# Allegro board 2019-08-16.brd
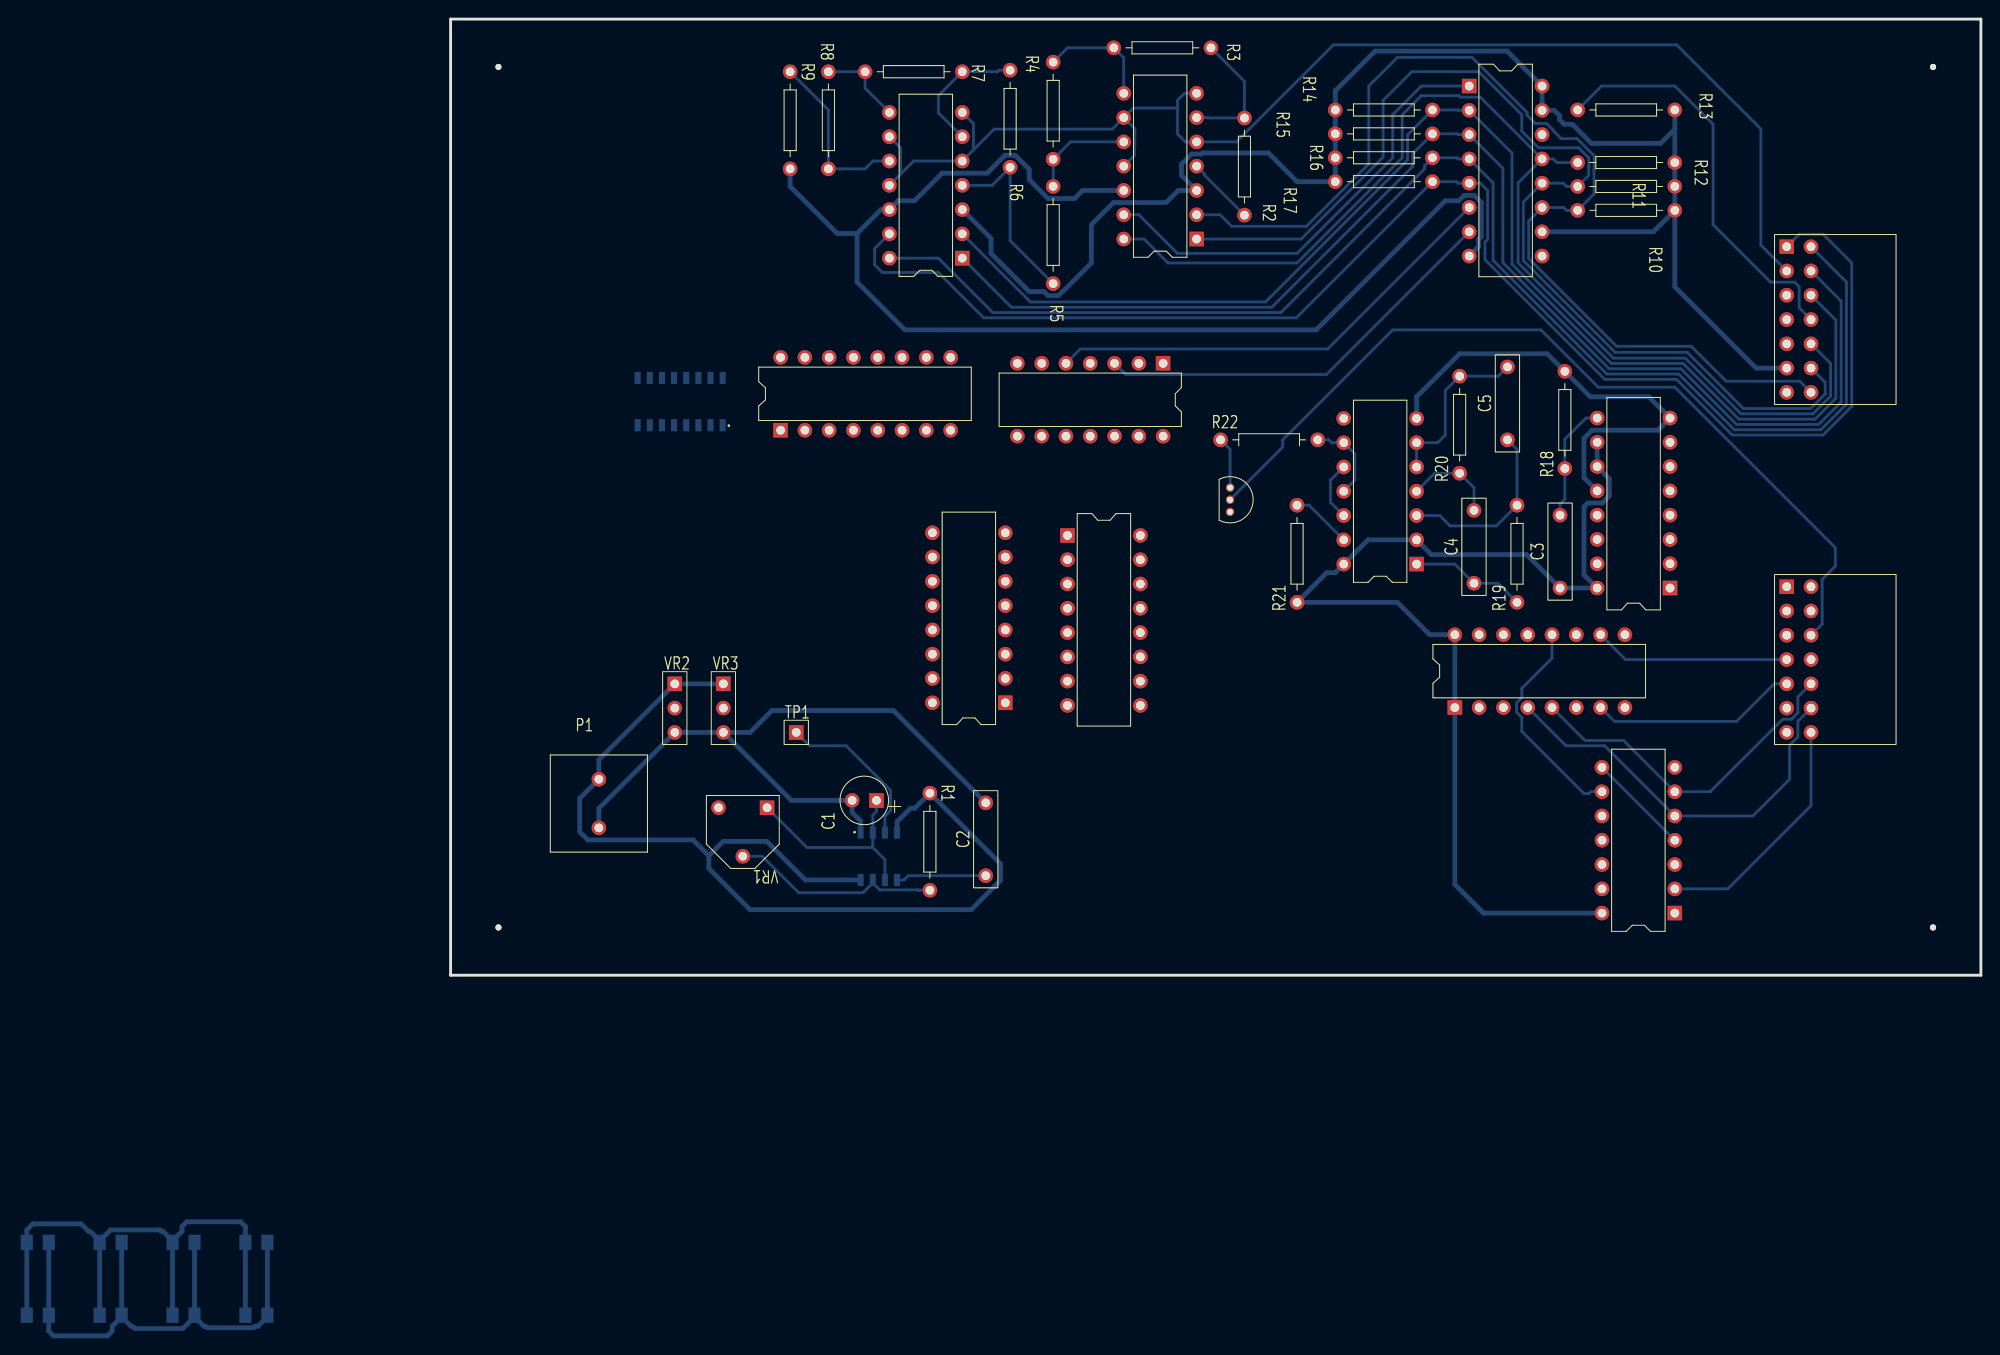
[diagram p0: board, top side]
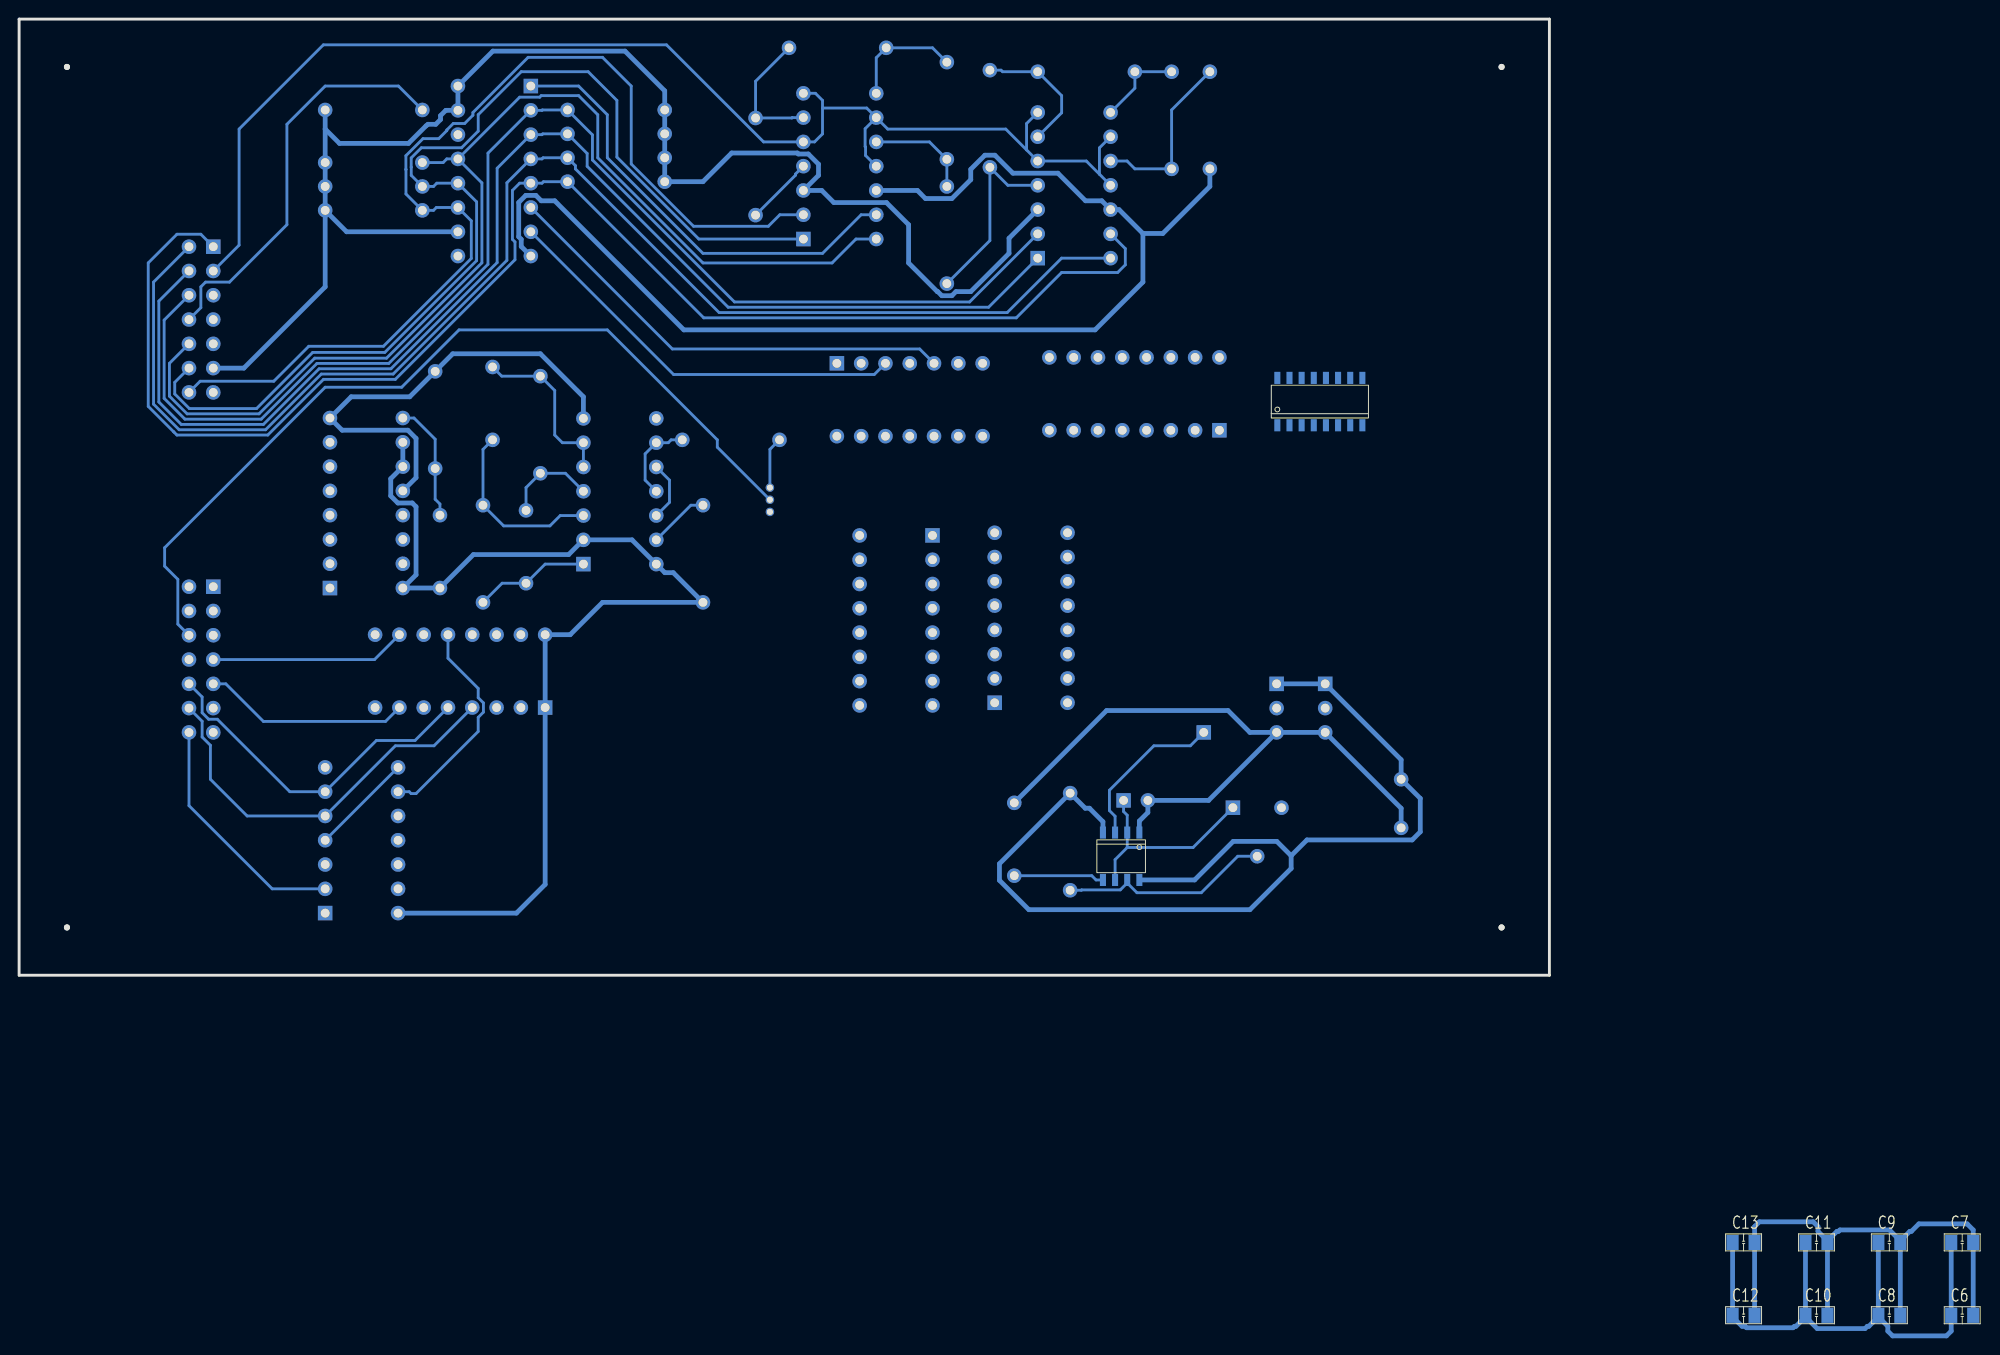
[diagram p1: board, bottom side, seen from below]

Outline 160 x 100 mm; copper layers: TOP, BOTTOM. Coordinates in mm from the lower left corner of the outline.
Outline path: 0,100 0,0 160,0 160,100 0,100

## Design rules (mm)
nets with their own width: min track width 0.5; nets +5V GND

## Placement (name value [footprint] x y rotation side)
C1  10uF  [CAP196]  44.52 18.29 90 top
C2  0.1uF  [CAP300]  55.95 10.41 90 top
C3  0.1uF  [CAP300]  116 40.5 90 top
C4  0.1uF  [CAP300]  107 41 90 top
C5  0.1uF  [CAP300]  110.5 56 90 top
C6  0.1uF  [SMDCAP]  -42.16 -35.56 180 bottom
C7  0.1uF  [SMDCAP]  -42.16 -27.94 180 bottom
C8  0.1uF  [SMDCAP]  -34.54 -35.56 180 bottom
C9  0.1uF  [SMDCAP]  -34.54 -27.94 180 bottom
C10  0.1uF  [SMDCAP]  -26.92 -35.56 180 bottom
C11  0.1uF  [SMDCAP]  -26.92 -27.94 180 bottom
C12  0.1uF  [SMDCAP]  -19.3 -35.56 180 bottom
C13  0.1uF  [SMDCAP]  -19.3 -27.94 180 bottom
NOREF  -  [unnamed]  155 5 0 top
NOREF#2  -  [unnamed]  5 5 0 top
NOREF#3  -  [unnamed]  5 95 0 top
NOREF#4  -  [unnamed]  155 95 0 top
P1  CON2  [2P]  15.5 20.5 0 top
P2  CON14  [JUMPER14]  139.7 76.2 270 top
P3  CON14  [JUMPER14]  139.7 40.64 270 top
Q1  2SC1815  [TO92]  81.5 51 0 top
R1  10K  [RES400]  50.11 19.05 270 top
R2  10K  [RES400]  83 79.5 90 top
R3  10K  [RES400]  79.5 97 180 top
R4  10K  [RES400]  63 95.5 270 top
R5  10K  [RES400]  63 82.5 270 top
R6  10K  [RES400]  58.5 84.5 90 top
R7  10K  [RES400]  53.5 94.5 180 top
R8  10K  [RES400]  39.5 94.5 270 top
R9  10K  [RES400]  35.5 94.5 270 top
R10  10K  [RES400]  128 80 180 top
R11  10K  [RES400]  128 82.5 180 top
R12  10K  [RES400]  128 85 180 top
R13  10K  [RES400]  128 90.5 180 top
R14  10K  [RES400]  92.5 90.5 0 top
R15  10K  [RES400]  92.5 88 0 top
R16  10K  [RES400]  92.5 85.5 0 top
R17  10K  [RES400]  92.5 83 0 top
R18  10K  [RES400]  116.5 53 90 top
R19  10K  [RES400]  111.5 39 90 top
R20  10K  [RES400]  105.5 52.5 90 top
R21  10K  [RES400]  88.5 39 90 top
R22  10K  [RES400]  80.5 56 0 top
TP1  TP  [JUMPER1]  36.14 25.4 0 top
U1  NE555  [SOIC8]  44.78 12.45 270 bottom
U2  LM339  [DIP14_3]  78 77 180 top
U3  LM339  [DIP14_3]  53.5 75 180 top
U4  40147  [DIP16_3]  106.5 93 0 top
U5  4069  [DIP14_3]  74.5 64 270 top
U6  4518  [SOIC16]  24 60 90 bottom
U7  4585  [DIP16_3]  34.5 57 90 top
U8  4027  [DIP16_3]  127.5 40.5 180 top
U9  4071  [DIP14_3]  128 6.5 180 top
U10  4001  [DIP14_3]  101 43 180 top
U11  4017  [DIP16_3]  58 28.5 180 top
U12  4051  [DIP16_3]  64.5 46 0 top
U13  4175  [DIP16_3]  105 28 90 top
VR1  1M  [VR1]  33.09 17.53 180 top
VR2  10K  [VR2]  23.44 27.94 0 top
VR3  10K  [VR2]  28.52 27.94 0 top

## Library data of the parts
C1 = Cap POL
C2-C5 = Cap NP
C6-C13 = Cap TEXT
P1 = CON2
P2 P3 = CON14
Q1 = 2SC1815
R1-R22 = resistor
TP1 = TP
U1 = NE555: Tolerance: ***; User Part Number: ***
U2 U3 = LM339: Tolerance: ***; User Part Number: ***
U4 = 40147: Tolerance: ***; User Part Number: ***
U5 = 4069: Tolerance: ***; User Part Number: ***
U6 = 4518: Tolerance: ***; User Part Number: ***
U7 = 4585: Tolerance: ***; User Part Number: ***
U8 = 4027: Tolerance: ***; User Part Number: ***
U9 = 4071: Tolerance: ***; User Part Number: ***
U10 = 4001: Tolerance: ***; User Part Number: ***
U11 = 4017: Tolerance: ***; User Part Number: ***
U12 = 4051: Tolerance: ***; User Part Number: ***
U13 = 4175: Tolerance: ***; User Part Number: ***
VR1 = VR1
VR2 VR3 = VR2_0

## Footprints (pads in the part's own frame, mm; a bottom-side part is the same pattern mirrored in y, then rotated)
2P
  round 1.524 hole 0.914: 1(0,0) 2(0,-5.08)
CAP196
  rect 1.524x1.524 hole 0.914: 1(0,0)
  round 1.524 hole 0.914: 2(0,2.54)
CAP300
  round 1.524 hole 0.914: 1(0,0) 2(7.62,0)
DIP14_3
  rect 1.524x1.524 hole 0.914: 1(0,0)
  round 1.524 hole 0.914: 2(0,-2.54) 3(0,-5.08) 4(0,-7.62) 5(0,-10.16) 6(0,-12.7) 7(0,-15.24) 8(7.62,-15.24) 9(7.62,-12.7) 10(7.62,-10.16) 11(7.62,-7.62) 12(7.62,-5.08) 13(7.62,-2.54) 14(7.62,0)
DIP16_3
  rect 1.524x1.524 hole 0.914: 1(0,0)
  round 1.524 hole 0.914: 2(0,-2.54) 3(0,-5.08) 4(0,-7.62) 5(0,-10.16) 6(0,-12.7) 7(0,-15.24) 8(0,-17.78) 9(7.62,-17.78) 10(7.62,-15.24) 11(7.62,-12.7) 12(7.62,-10.16) 13(7.62,-7.62) 14(7.62,-5.08) 15(7.62,-2.54) 16(7.62,0)
JUMPER1
  rect 1.524x1.524 hole 0.914: 1(0,0)
JUMPER14
  rect 1.524x1.524 hole 0.914: 1(0,0)
  round 1.524 hole 0.914: 2(0,2.54) 3(2.54,0) 4(2.54,2.54) 5(5.08,0) 6(5.08,2.54) 7(7.62,0) 8(7.62,2.54) 9(10.16,0) 10(10.16,2.54) 11(12.7,0) 12(12.7,2.54) 13(15.24,0) 14(15.24,2.54)
RES400
  round 1.524 hole 0.914: 1(0,0) 2(10.16,0)
SMDCAP
  rect 1.27x1.6 smd: 1(-0.15,0) 2(2.15,0)
SOIC8
  rect 1.27x0.635 smd: 1(-2.477,1.905) 2(-2.477,0.635) 3(-2.477,-0.635) 4(-2.477,-1.905) 5(2.477,-1.905) 6(2.477,-0.635) 7(2.477,0.635) 8(2.477,1.905)
SOIC16
  rect 1.27x0.635 smd: 1(-2.477,4.445) 2(-2.477,3.175) 3(-2.477,1.905) 4(-2.477,0.635) 5(-2.477,-0.635) 6(-2.477,-1.905) 7(-2.477,-3.175) 8(-2.477,-4.445) 9(2.477,-4.445) 10(2.477,-3.175) 11(2.477,-1.905) 12(2.477,-0.635) 13(2.477,0.635) 14(2.477,1.905) 15(2.477,3.175) 16(2.477,4.445)
TO92
  round 0.889 hole 0.635: 1(0,0) 2(0,-1.27) 3(0,-2.54)
unnamed
  round 0.635 hole 3.175 unplated: (0,0)
VR1
  rect 1.524x1.524 hole 0.914: 1(0,0)
  round 1.524 hole 0.914: 2(2.54,5.08) 3(5.08,0)
VR2
  rect 1.524x1.524 hole 0.914: 1(0,2.54)
  round 1.524 hole 0.914: 2(0,0) 3(0,-2.54)

## Nets
+5V: C3.1 C6.1 C7.1 C8.1 C9.1 C10.1 C11.1 C12.1 C13.1 P1.1 P2.11 R1.1 R10.1 R11.1 R12.1 R13.1 R14.1 R15.1 R16.1 R17.1 R21.1 U1.4(RST) U1.8(VCC) U2.3 U3.3 U4.10(I\9\) U4.15(I\0\) U4.16(VCC) U5.14 U6.16 U7.4(A>BIN) U7.5(A<BIN) U7.6(A=BIN) U7.16(VCC) U8.10(J) U8.11(K) U8.16 U9.14 U10.2(I1) U10.14 U11.16(VCC) U12.16(VCC) U13.1(R\S\T\) U13.16(VCC) VR2.1(A) VR3.1(A)
GND: C1.2 C2.2 C6.2 C7.2 C8.2 C9.2 C10.2 C11.2 C12.2 C13.2 P1.2 P2.13 R9.2 R18.2 U1.1(GND) U2.12 U3.12 U4.8(GND) U5.7 U6.1(CLK) U6.8 U6.9(CLK) U7.8(GND) U8.8 U8.12(RST) U9.7 U10.7 U11.8(GND) U11.13(C\K\E\N\) U12.7(VEE) U12.8(GND) U12.9(C) U13.8(GND) VR2.3(WIPER) VR3.3(WIPER)
ADC0: P2.14 R10.2 U2.2(OUT) U4.11(I\1\)
ADC1: P2.12 R11.2 U2.1(OUT) U4.12(I\2\)
ADC2: P2.10 R12.2 U2.14(OUT) U4.13(I\3\)
ADC3: P2.8 R13.2 U2.13(OUT) U4.1(I\4\)
ADC4: P2.6 R14.2 U3.2(OUT) U4.2(I\5\)
ADC5: P2.4 R15.2 U3.1(OUT) U4.3(I\6\)
ADC6: P2.2 R16.2 U3.14(OUT) U4.4(I\7\)
ADC7: P2.1 R17.2 U3.13(OUT) U4.5(I\8\)
CLK: TP1.1 U1.3(OUT) U6.2(EN)
MOTOR-GND: P3.6 Q1.2(C)
MR: U6.7(CLR) U6.15(CLR) U8.14(Q\) U11.15(RST) U12.6(E\N\)
MR2: P3.13 U8.15(Q)
SW1: P3.14 U9.2(I1)
SW2: P3.12 U9.5(I0) U13.4(D0)
SW3: P3.10 U9.6(I1) U13.5(D1)
SW4: P3.8 U9.9(I1) U13.12(D2)
SWLED1: P3.11 U13.2(Q0)
SWLED2: P3.9 U12.11(A) U13.7(Q1)
SWLED3: P3.7 U12.10(B) U13.10(Q2)
VR3: P2.5 VR3.2(B)
VR-LED: P2.3 U2.5(+IN) U2.7(+IN) U2.9(+IN) U2.11(+IN) U3.5(+IN) U3.7(+IN) U3.9(+IN) U3.11(+IN)
N01821: R1.2 U1.7(DISC) VR1.2
N01825: C1.1 U1.2(TRIG) U1.6(THR) VR1.1
N01879: R2.2 R3.1 U2.6(-IN)
N01886: R2.1 U2.4(-IN) VR2.2(B)
N01929: R3.2 R4.1 U2.8(-IN)
N02004: R4.2 R5.1 U2.10(-IN)
N02079: R5.2 R6.1 U3.4(-IN)
N02154: R6.2 R7.1 U3.6(-IN)
N02229: R7.2 R8.1 U3.8(-IN)
N02304: R8.2 R9.1 U3.10(-IN)
N05133: U4.9(A\) U5.1(I)
N05160: U4.7(B\) U5.3(I)
N05172: U4.6(C\) U5.5(I)
N05184: U4.14(D\) U5.9(I)
N05202: U5.2(O) U7.10(A0)
N05214: U5.4(O) U7.7(A1)
N05226: U5.6(O) U7.2(A2)
N05238: U5.8(O) U7.15(A3)
N05506: U6.6(Q3) U6.10(EN)
N05615: U6.11(Q0) U7.11(B0)
N05627: U6.12(Q1) U7.9(B1)
N05639: U6.13(Q2) U7.1(B2)
N05651: U6.14(Q3) U7.14(B3)
N05837: C2.1 U1.5(CV)
N06039: U7.3(A=BOUT) U9.1(I0)
N06118: U8.13(CLK) U9.3(O)
N06347: C3.2 R18.1 U8.9(SET)
N12761: Q1.1(E) R22.1
N12765: Q1.3(B)
N12791: R22.2 U10.9(I1) U10.11(O)
N12870: U10.10(O) U10.12(I0)
N12949: R21.2 U10.13(I1) U12.3(X)
N13065: U9.4(O) U9.8(I0)
N13106: U9.10(O) U13.9(CLK)
N16220: U10.8(I0) U11.3(0)
N16266: U11.10(4) U12.13(X0)
N16278: U11.5(6) U12.14(X1)
N16290: U11.11(9) U12.15(X2)
N16648: C5.1 R19.2 U10.3(O)
N16662: C5.2 R20.2 U10.5(I0) U10.6(I1)
N16697: C4.1 R19.1 U10.1(I0)
N16721: C4.2 R20.1 U10.4(O) U11.14(CLK)

Pads without a net: P2 7 9; P3 1 2 3 4 5; U5 10 11 12 13; U6 3 4 5; U7 12 13; U8 1 2 3 4 5 6 7; U9 11 12 13; U11 1 2 4 6 7 9 12; U12 1 2 4 5 12; U13 3 6 11 13 14 15; VR1 3

## Routing (per net, layer and track width the routed paths; a pad name or vN(x,y) marks a point on that pad's centre or on a via; arc(x,y) is an arc through that point)
+5V: length 443
  BOTTOM w0.5: 128,88.5 126.5,87 119.29,87 117.45,88.84 117.25,89 116.44,89 115.94,89.5 115.94,89.91 115.39,90.46 U4.15 U4.16 110.47,96.65 96.65,96.65 92.5,92.5 R14.1 R15.1 R16.1 R17.1 88.5,83 85.5,86 78.63,86 78.52,85.89 77.48,85.89 76.42,84.83 76.42,83.66 U2.3 76.08,82.08 74.81,80.81 69.31,80.81 67,78.5 67,74.5 64,71.5 63.95,71.5 63.52,71.07 62.48,71.07 62.05,71.5 60.5,71.5 56.5,75.5 56.5,77.08 U3.3 ; 128,88.5 R13.1 ; 128,88.5 R12.1 R11.1 R10.1 ; C9.1 C8.1 -34.39,-35.73 ; U4.10 125.76,77.76 R10.1 ; -34.39,-35.73 -33.4,-36.72 -33.24,-36.72 -33,-36.95 -28,-36.95 -26.77,-35.73 ; -34.39,-35.73 -35.39,-36.72 -35.39,-37.22 -35.89,-37.72 -41.51,-37.72 -42.01,-37.22 C6.1 C7.1 ; C13.1 C12.1 -19.15,-35.73 -20.15,-36.72 -20.46,-36.72 -20.61,-36.86 -25.47,-36.86 -25.62,-36.72 -25.78,-36.72 -26.77,-35.73 ; 46.68,14.92 46.68,16.06 48.09,17.47 48.53,17.47 R1.1 57.5,11.66 57.5,9.93 54.43,6.86 31.31,6.86 27,11.17 27,12.5 ; VR3.1 VR2.1 15.5,22.54 P1.1 13.5,18.5 13.5,15 14.35,14.15 25.35,14.15 27,12.5 ; 27,12.5 28.5,14 33.06,14 37.09,9.97 U1.8 ; U8.10 U8.11 121.15,51.93 121.15,50.14 120.4,49.39 118.89,49.39 118.5,49 118.5,41.88 U8.16 C3.1 112.5,44 102.54,44 U10.2 95.92,45.54 U10.14 92.48,42.1 91.6,42.1 R21.1 99,39 102.38,35.62 U13.16 U13.1 105,9.5 108,6.5 U9.14 ; R10.1 128,72 136.5,63.5 P2.11 ; C11.1 C10.1 -26.77,-35.73
GND: length 309.8
  BOTTOM w0.5: C8.2 C9.2 -36.69,-27.77 ; VR3.3 VR2.3 15.5,17.46 P1.2 ; VR3.3 31.31,25.4 33.6,27.69 46.3,27.69 C2.2 ; VR3.3 35.63,18.29 C1.2 41.98,17.02 42.87,16.13 U1.1 ; C10.2 C11.2 -29.07,-27.77 ; 42.5,77.58 45,80.08 U3.12 46.8,81 48.5,81 51.39,83.89 56.1,83.89 57.98,85.77 59.02,85.77 60.5,84.29 60.5,83.21 62.48,81.23 65.23,81.23 66.08,82.08 U2.12 ; 42.5,77.58 40.42,77.58 35.5,82.5 R9.2 ; 42.5,77.58 42.5,72.5 47.5,67.5 90.5,67.5 104,81 105.41,81 105.98,81.57 107.02,81.57 107.77,80.82 107.77,77.24 107.5,76.97 107.5,76.22 U4.8 ; -36.69,-27.77 -35.55,-26.64 -30.38,-26.64 -30.23,-26.78 -30.07,-26.78 -29.07,-27.77 ; -36.69,-27.77 -37.69,-26.78 -37.85,-26.78 -38.63,-26 -43.68,-26 -44.31,-26.64 C7.2 C6.2 ; U8.12 118.5,52.04 118.5,56.15 119.36,57.01 126.23,57.01 U8.8 125.28,60.5 119.16,60.5 R18.2 114.66,65 105.5,65 101,60.5 U10.7 ; C12.2 C13.2 -21.45,-26.28 -21.95,-25.78 -27.58,-25.78 -28.08,-26.28 -28.08,-26.78 -29.07,-27.77
ADC0: length 110.1
  BOTTOM w0.3: U2.2 80.46,79.54 81.67,78.33 89.48,78.33 96,84.85 96,93 99,96 106.78,96 112.55,90.23 112.55,89.95 113.41,89.09 114.6,89.09 115.29,88.4 115.29,88.34 116.12,87.5 117.77,87.5 119.56,85.71 119.56,84.28 119.55,84.27 119.55,81.71 R10.2 116.67,80 116.37,80.3 U4.11 112.72,78.9 112.72,74.97 121.91,65.78 129.72,65.78 133.37,62.13 141.07,62.13 P2.14
ADC1: length 114.6
  BOTTOM w0.3: U2.1 88.93,77 97.5,85.57 97.5,91.5 100.5,94.5 107.5,94.5 112,90 112,88.28 113.74,86.55 117.94,86.55 119.01,85.48 119.01,84.52 119,84.51 119,83.66 R11.2 116.67,82.5 116.33,82.84 U4.12 112.17,80.89 112.17,74.74 121.77,65.14 129.3,65.14 135.18,59.27 142.2,59.27 143.73,60.8 143.73,62.01 P2.12
ADC2: length 119.5
  BOTTOM w0.3: U4.13 107.67,91.83 105.57,91.83 105.4,92 101.5,92 99.5,90 99.5,85.5 88.5,74.5 75,74.5 72.5,77 U2.14 ; U4.13 111.61,82.87 111.61,74.51 121.58,64.54 129.09,64.54 134.92,58.72 142.43,58.72 144.28,60.57 144.28,64 P2.10 ; U4.13 115.29,85.38 115.67,85 R12.2
ADC3: length 90.7
  BOTTOM w0.3: U4.1 101.5,93 98.5,90 98.5,85.5 88.5,75.5 76,75.5 71.96,79.54 U2.13 ; R13.2 120.34,93 128,93 132,89 132,78.5 138.01,72.49 140.51,72.49 141,72 141,69.82 P2.8
ADC4: length 137.1
  BOTTOM w0.3: U3.2 60.62,70.42 85.2,70.42 100.05,85.27 100.05,87.89 R14.2 105.29,90.5 105.33,90.46 U4.2 110.98,85.98 110.98,74.36 121.35,63.99 128.86,63.99 134.69,58.16 142.66,58.16 144.84,60.34 144.84,68.52 P2.6
ADC5: length 136.7
  BOTTOM w0.3: P2.4 145.39,70.51 145.39,59.96 143.04,57.61 134.46,57.61 128.63,63.43 121.12,63.43 110.02,74.54 110.02,84.4 U4.3 105.33,87.92 105.25,88 R15.2 100.61,85.95 100.61,84.61 85.87,69.87 58.63,69.87 U3.1
ADC6: length 145
  BOTTOM w0.3: U3.14 51,75 56.69,69.31 86.81,69.31 101.84,84.34 101.84,84.68 R16.2 105.21,85.5 105.33,85.38 U4.4 109,82.88 109,74.77 120.89,62.88 128.41,62.88 134.23,57.05 143.27,57.05 145.95,59.73 145.95,72.49 P2.2
ADC7: length 154.7
  BOTTOM w0.3: U3.13 44.34,76 44.34,74.3 45.14,73.5 51,73.5 55.74,68.76 88.42,68.76 R17.2 105.17,83 105.33,82.84 U4.5 107.67,82.84 108.42,82.09 108.42,76.96 108.15,76.7 108.15,74.84 120.67,62.32 128.18,62.32 134,56.5 143.5,56.5 143.82,56.82 146.5,59.5 146.5,74.5 143.5,77.5 141,77.5 P2.1
CLK: length 17
  BOTTOM w0.3: U1.3 45.41,16.64 46,17.23 46,19.35 41.35,24 37.54,24 TP1.1
MOTOR-GND: length 90.7
  BOTTOM w0.3: Q1.2 87,55.23 87,56 98.5,67.5 114,67.5 120,61.5 128,61.5 144.79,44.71 144.79,42.79 143.41,41.41 143.41,36.73 P3.6
SW1: length 25.5
  BOTTOM w0.3: U9.2 133.54,9.04 142.24,17.74 P3.14
SW2: length 42
  BOTTOM w0.3: U13.4 116.62,24 120.66,24 U9.5 136.16,16.66 140,20.5 140,24.05 140.87,24.92 140.87,26.57 P3.12
SW3: length 36.4
  BOTTOM w0.3: P3.10 140.87,29.11 140.87,27.46 140.18,26.77 139.27,26.77 131.7,19.2 U9.6 122.65,24.55 118.61,24.55 U13.5
SW4: length 23
  BOTTOM w0.3: U13.12 115.16,33.16 112,30 112,29.03 111.45,28.48 111.45,27.52 112,26.97 112,25.5 118.5,19 119.01,19 119.21,19.2 U9.9
SWLED2: length 21.7
  BOTTOM w0.3: U13.7 121.69,26.55 134.45,26.55 138.39,30.48 P3.9
SWLED3: length 20.5
  BOTTOM w0.3: U13.10 122.84,33.02 P3.7
VR-LED: length 139.3
  BOTTOM w0.3: 54.67,86.33 56.84,88.5 69.18,88.5 U2.9 ; 54.67,86.33 U3.5 48.42,85.16 47.05,83.79 ; 54.67,86.33 54.67,89.07 U3.7 ; U2.9 71.55,88.53 71.55,86.68 71.5,86.63 71.5,85.74 U2.11 ; U2.9 71.38,90.7 76,90.7 ; U3.9 47.05,86.53 47.05,83.79 ; 76,90.7 76,87.99 76.83,87.16 U2.5 82.16,87.16 92.31,97.31 128.19,97.31 137,88.5 137,76.36 P2.3 ; 76,90.7 76,91.5 76.74,92.24 U2.7 ; 47.05,83.79 U3.11
N01821: length 22.2
  BOTTOM w0.3: 44.14,9.97 44.14,9.65 ; 44.14,9.65 44.86,8.93 48.9,8.93 48.94,8.89 R1.2 ; 44.14,9.65 43.12,8.64 36.39,8.64 32.58,12.45 VR1.2
N01825: length 21.8
  BOTTOM w0.3: VR1.1 37.26,13.36 44.14,13.36 ; C1.1 44.52,17.12 44.14,16.74 44.14,13.36 ; 44.14,13.36 45.41,12.09 U1.6
N01879: length 13.8
  BOTTOM w0.3: U2.6 79.17,89.7 79.21,89.66 R2.2 83,93.5 R3.1
N01886: length 7.2
  BOTTOM w0.3: U2.4 78.82,83.8 78.82,83.68 R2.1
N01929: length 12.2
  BOTTOM w0.3: U2.8 70.38,95.96 R3.2 64.5,97 R4.1
N02004: length 11
  BOTTOM w0.3: R5.1 R4.2 64.82,87.16 U2.10
N02079: length 19.8
  BOTTOM w0.3: U3.4 56.62,82.62 R6.1 58.5,76.84 R5.2
N02154: length 13.9
  BOTTOM w0.3: R6.2 57.33,94.66 57.17,94.5 R7.1 51,92 51,90.2 U3.6
N02229: length 9.2
  BOTTOM w0.3: U3.8 43.34,92.78 R7.2 R8.1
N02304: length 18.5
  BOTTOM w0.3: R9.1 39.5,90.5 R8.2 43.34,84.34 44.16,85.16 U3.10
N05160: length 43.7
  BOTTOM w0.3: U5.3 70.59,62.83 91.57,62.83 U4.7
N05172: length 48.9
  BOTTOM w0.3: U5.5 65.84,65.5 91.7,65.5 U4.6
N05837: length 9.5
  BOTTOM w0.3: 46.68,9.97 47.4,9.97 47.85,10.41 C2.1
N06347: length 12.5
  BOTTOM w0.3: U8.9 118.71,58.28 116.5,56.07 R18.1 116.5,49.79 116,49.29 C3.2
N12761: length 5.4
  BOTTOM w0.3: R22.1 81.5,55 Q1.1
N12791: length 8.9
  BOTTOM w0.3: U10.11 94.55,51.79 94.55,54.53 U10.9 92.13,55.7 91.83,56 R22.2
N12870: length 6.2
  BOTTOM w0.3: U10.12 92,49.46 92,51.78 U10.10
N12949: length 6.4
  BOTTOM w0.3: U10.13 89.76,49.16 R21.2
N13065: length 10.8
  BOTTOM w0.3: U9.4 U9.8
N16648: length 19.1
  BOTTOM w0.3: C5.1 111.5,55 R19.2 109.34,47 104.5,47 103.42,48.08 U10.3
N16662: length 18.1
  BOTTOM w0.3: U10.5 U10.6 103.2,55.7 104,56.5 104,61.16 R20.2 109.54,62.66 C5.2
N16697: length 12.2
  BOTTOM w0.3: R19.1 109.5,41 C4.1 105,43 U10.1
N16721: length 9.8
  BOTTOM w0.3: C4.2 107,51 R20.1 102.88,52.5 U10.4
